# Altium PCB Nixie_Backplane_PCB.PcbDoc
Units mil, origin at the board's own origin, x right, y up, seen from the top; angles counter-clockwise.
Board outline 8000 x 4000 mil, 2 copper layers (Top Layer, Bottom Layer); 48 components, 112 nets, 366 pads, 14 vias.
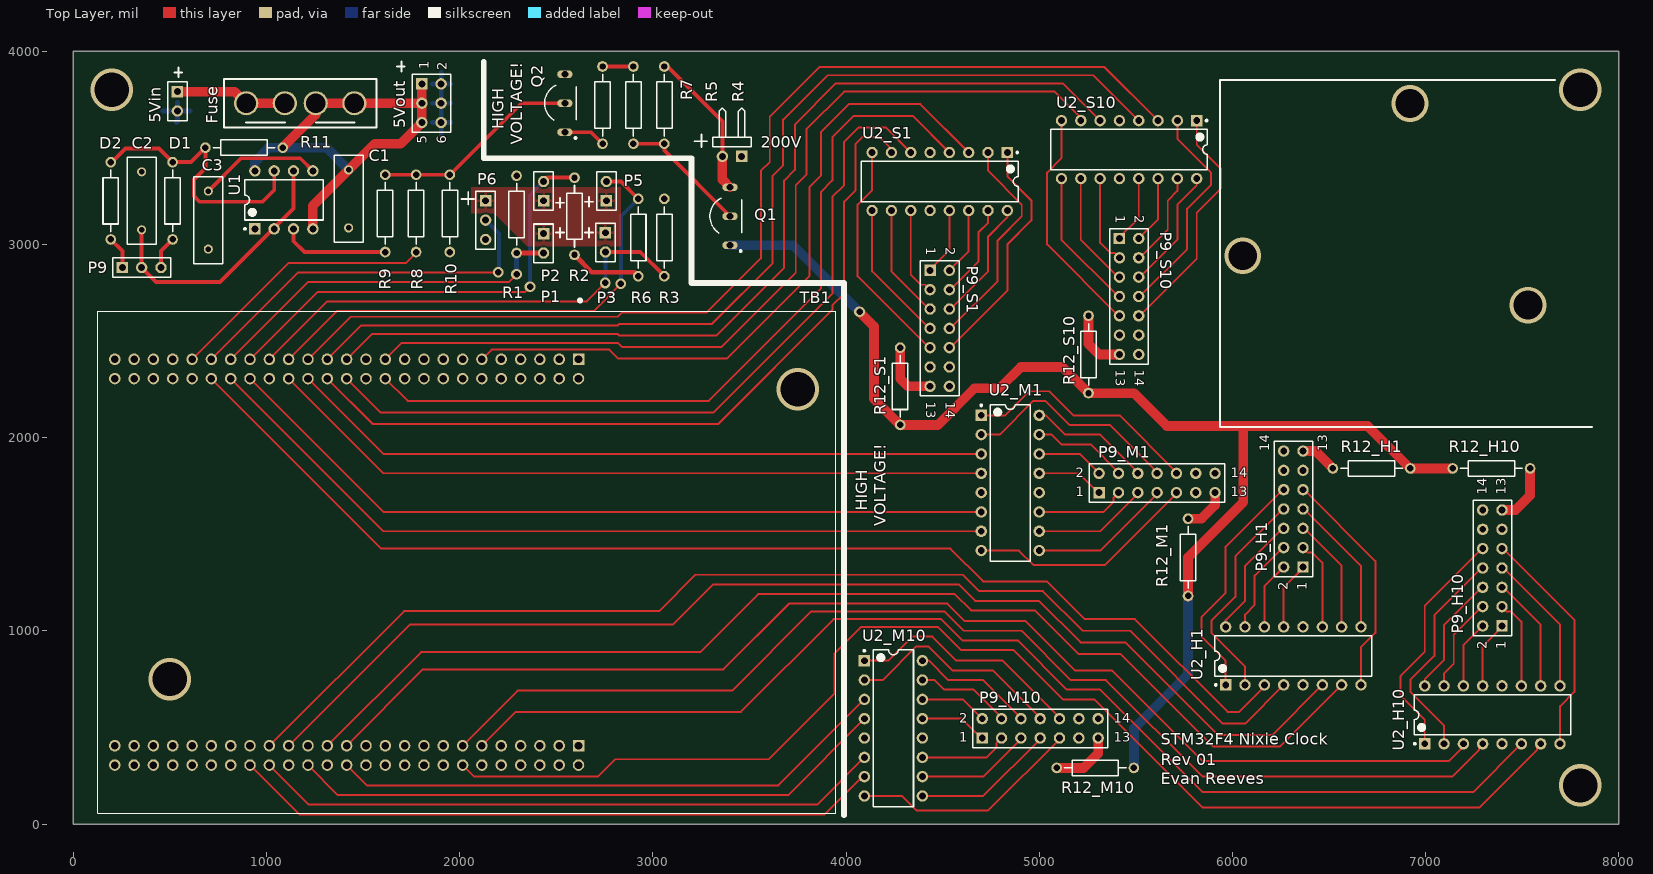
[diagram p0: Top Layer view]
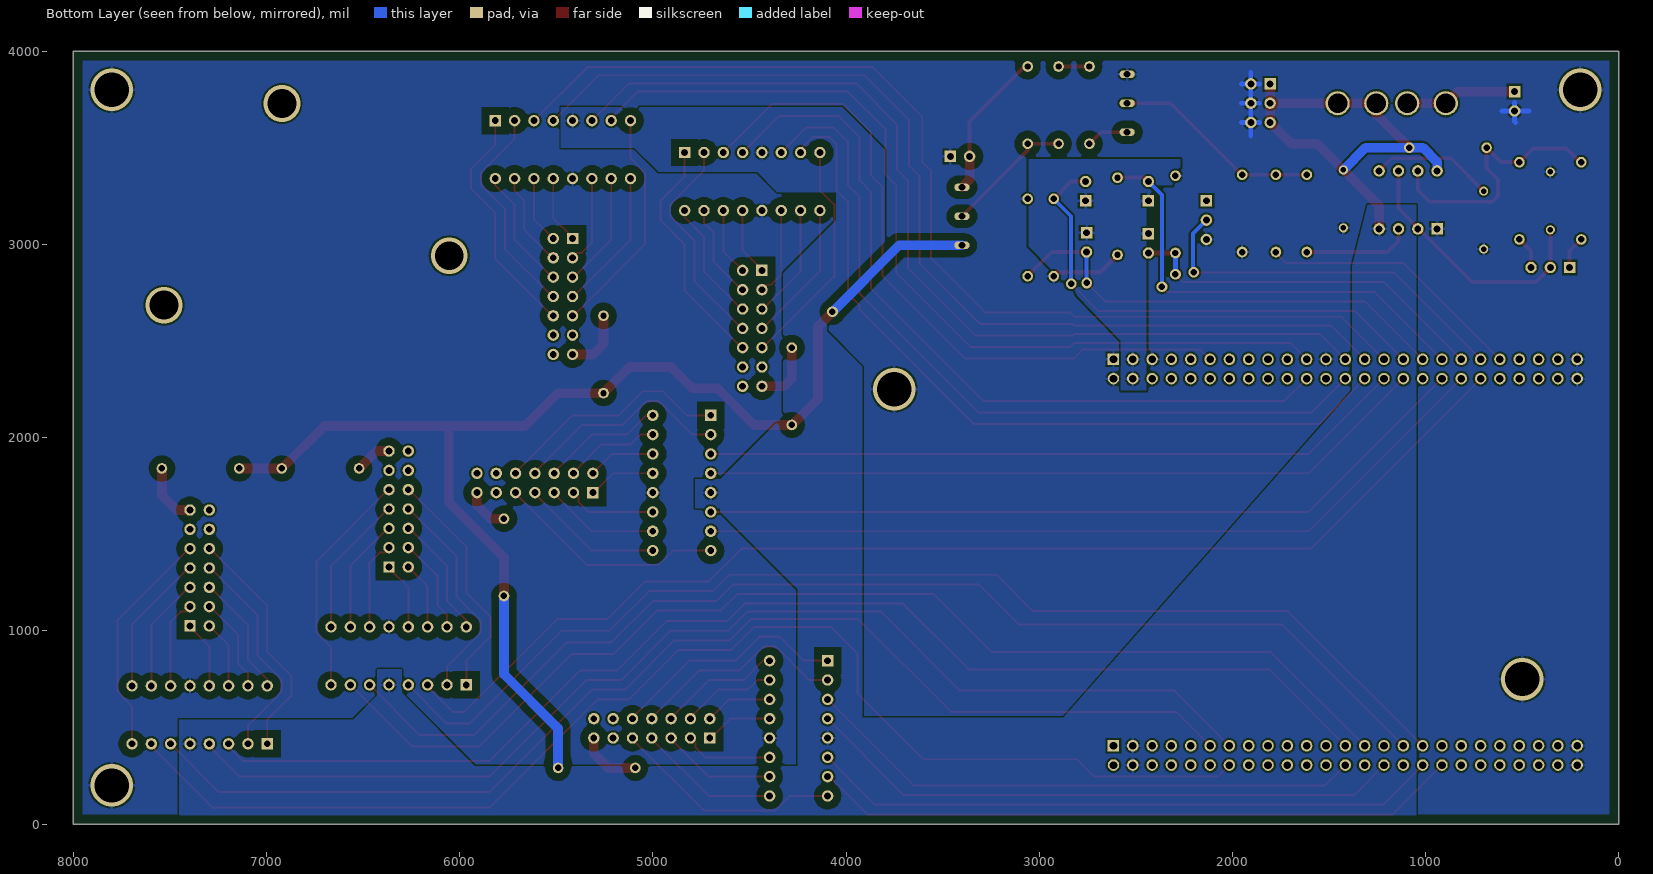
[diagram p1: Bottom Layer view, seen from below]

## Layer stack, top to bottom
Top Layer: signal copper 1.4
Dielectric: dielectric 12.6, FR-4, Dk 4.8
Bottom Layer: signal copper 1.4

## Board outline
0,0 0,4000 8000,4000 8000,0 0,0

## Design rules (kind name [scope] priority, off if disabled: settings)
Clearance Clearance_1 [InNetClass('HV')] p1: gap=40
Clearance "Schematic Clearance Constraint_4" [InNet('NetQ1_2')] p2: gap=40
Clearance "Schematic Clearance Constraint_3" [InNet('NetR5_2')] p3: gap=40
Clearance "Schematic Clearance Constraint_2" [InNet('Net200V_2')] p4: gap=40
Clearance "Schematic Clearance Constraint_1" [InNet('NetQ2_1')] p5: gap=40
Clearance "Schematic Clearance Constraint" [InNet('VANODE')] p6: gap=40
Clearance [All] p7: gap=10
HoleSize [All] p1: absolutevalues=TRUE maxlimit=400 minlimit=10 maxpercent=80.000 minpercent=20.000
PolygonConnect [All] p1: connectstyle=Relief reliefconductorwidth=15 reliefentries=4 polygonreliefangle="90 Angle"
RoomDefinition Main [InComponentClass('Main')] p1 off: confinementstyle=ConfineIn formatcopy=TRUE lockcomponents=FALSE outline 3925,55 3925,2878.39 3742.9,3057.03 3742.9,3975 25,3975 25,55
RoomDefinition S10 [InComponentClass('S10')] p2 off: confinementstyle=ConfineIn formatcopy=TRUE lockcomponents=FALSE outline -2000,-2000 0,-2000 0,-1000 -2000,-1000
RoomDefinition S1 [InComponentClass('S1')] p3 off: confinementstyle=ConfineIn formatcopy=TRUE lockcomponents=FALSE outline -2000,-2000 0,-2000 0,-1000 -2000,-1000
RoomDefinition M10 [InComponentClass('M10')] p4 off: confinementstyle=ConfineIn formatcopy=TRUE lockcomponents=FALSE outline -2000,-2000 0,-2000 0,-1000 -2000,-1000
RoomDefinition M1 [InComponentClass('M1')] p5 off: confinementstyle=ConfineIn formatcopy=TRUE lockcomponents=FALSE outline -2000,-2000 0,-2000 0,-1000 -2000,-1000
RoomDefinition H1 [InComponentClass('H1')] p6 off: confinementstyle=ConfineIn formatcopy=TRUE lockcomponents=FALSE outline -2000,-2000 0,-2000 0,-1000 -2000,-1000
RoomDefinition H10 [InComponentClass('H10')] p7 off: confinementstyle=ConfineIn formatcopy=TRUE lockcomponents=FALSE outline 6825,320 7820,320 7820,1865 6825,1865
RoutingVias [All] p1: holewidth=28 width=50 viastyle="Through Hole" minholewidth=28 minwidth=50 maxholewidth=28 maxwidth=50
SilkscreenOverComponentPads [All] p1: minsilkscreentomaskgap=8
SolderMaskExpansion [All] p1: expansion=4
Width [All] p1: maxlimit=200 minlimit=10 preferedwidth=10
26 further rules are at their usual default settings.

## Classes and differential pairs
component class S10: P9_S10 R12_S10 U2_S10
component class S1: P9_S1 R12_S1 U2_S1
component class M10: P9_M10 R12_M10 U2_M10
component class M1: P9_M1 R12_M1 U2_M1
component class H10: P9_H10 R12_H10 U2_H10
component class H1: P9_H1 R12_H1 U2_H1
channel class Tube: Tube_H1 Tube_H10 Tube_M1 Tube_M10 Tube_S1 Tube_S10
component class Main: 5Vin 5Vout 200V C1 C2 C3 D1 D2 Fuse P1 P2 P3 P5 P6 P9 Q1 Q2 R1 R2 R3 R4 R5 R6 R7 R8 R9 R10 R11 TB1 U1
net class HV: C0_H1 C0_H10 C0_M1 C0_M10 C0_S1 C0_S10 C1_H1 C1_H10 C1_M1 C1_M10 C1_S1 C1_S10 C2_H1 C2_H10 C2_M1 C2_M10 C2_S1 C2_S10 C3_H1 C3_H10 C3_M1 C3_M10 C3_S1 C3_S10 C4_H1 C4_H10 C4_M1 C4_M10 C4_S1 C4_S10 C5_H1 C5_H10 C5_M1 C5_M10 C5_S1 C5_S10 C6_H1 C6_H10 C6_M1 C6_M10 C6_S1 C6_S10 C7_H1 C7_H10 C7_M1 C7_M10 C7_S1 C7_S10 C8_H1 C8_H10 C8_M1 C8_M10 C8_S1 C8_S10 C9_H1 C9_H10 C9_M1 C9_M10 C9_S1 C9_S10 Net200V_2 NetP9_H1_13 NetP9_H10_13 NetP9_M1_13 NetP9_M10_13 NetP9_S1_13 NetP9_S10_13 NetQ1_2 NetQ2_1 NetR5_2 VANODE

## Components (designator, comment, footprint, x,y, rotation, side; value= is the part's Value field where it differs from the comment)
5Vin "Header, 5V" HDR1X2 540,3790 r270 top (schematic designator P7)
5Vout "Header, 5V" HDR2X3 1805,3830 r270 top (schematic designator P8)
200V "200Vin" HDR1X2H 3460,3455 r180 top (schematic designator P4)
C1 "Cap" RAD-0.3 1425.91,3235 r270 top
C2 "" RAD-0.3 355,3225 r270 top
C3 "Cap" RAD-0.3 700,3125 r90 top
D1 "Schottky" AXIAL-0.4 515,3225 r90 top
D2 "Schottky" AXIAL-0.4 195,3225 r270 top
Fuse "Blade Fuse" FUSEHOLDER 895.91,3730 r0 top (schematic designator F1)
P1 "BTN, Hour" HDR1X2 2435,3055 r270 top
P2 "BTN, Second" HDR1X2 2435,3225 r90 top
P3 "BTN, Minute" HDR1X2 2755,3060 r270 top
P5 "BTN, Anniv" HDR1X2 2760,3225 r90 top
P6 "Pot, Digital" HDR1X3 2135,3225 r270 top
P9 "Pot, Analog" HDR1X3 255,2880 r0 top
P9_H1 "Header 7X2" HDR2X7 6365,1330 r90 top (schematic designator P9)
P9_H10 "Header 7X2" HDR2X7 7395,1025 r90 top (schematic designator P9)
P9_M1 "Header 7X2" HDR2X7 5310,1715 r0 top (schematic designator P9)
P9_M10 "Header 7X2" HDR2X7 4705,445 r0 top (schematic designator P9)
P9_S1 "Header 7X2" HDR2X7 4435,2865 r270 top (schematic designator P9)
P9_S10 "Header 7X2" HDR2X7 5415,3030 r270 top (schematic designator P9)
Q1 "PNP" T0-226-BEND 3350,2970 r0 top
Q2 "NPN" T0-226-BEND 2495,3555 r0 top
R1 "AXIAL-0.4" AXIAL-0.4 2295,3155 r90 top
R2 "AXIAL-0.4" AXIAL-0.4 2595,3145 r270 top
R3 "AXIAL-0.4" AXIAL-0.4 3060,3035 r90 top
R4 "AXIAL-0.4" AXIAL-0.4 3060,3720 r270 top
R5 "AXIAL-0.4" AXIAL-0.4 2900,3720 r90 top
R6 "AXIAL-0.4" AXIAL-0.4 2925,3035 r270 top
R7 "AXIAL-0.4" AXIAL-0.4 2740,3720 r270 top
R8 "AXIAL-0.4" AXIAL-0.4 1775,3160 r90 top
R9 "AXIAL-0.4" AXIAL-0.4 1615,3160 r270 top
R10 "AXIAL-0.4" AXIAL-0.4 1950,3160 r270 top
R11 "AXIAL-0.4" AXIAL-0.4 885,3500 r180 top
R12_H1 "AXIAL-0.4" AXIAL-0.4 6720,1840 r180 top (schematic designator R12)
R12_H10 "AXIAL-0.4" AXIAL-0.4 7340,1840 r0 top (schematic designator R12)
R12_M1 "AXIAL-0.4" AXIAL-0.4 5770,1380 r90 top (schematic designator R12)
R12_M10 "AXIAL-0.4" AXIAL-0.4 5290,290 r180 top (schematic designator R12)
R12_S1 "AXIAL-0.4" AXIAL-0.4 4280,2265 r90 top (schematic designator R12)
R12_S10 "AXIAL-0.4" AXIAL-0.4 5255,2430 r90 top (schematic designator R12)
TB1 "STM32F4DISCOVERY" *MODULE_STM32F4DISCOVERY_STM32F4DISCOVERY_Primary 2037.95,1355 r270 top
U1 "555 Timer" DIP-8 1090.91,3230 r90 top
U2_H1 "SN74141" DIP-16 6315,870 r90 top (schematic designator U2)
U2_H10 "SN74141" DIP-16 7345,565 r90 top (schematic designator U2)
U2_M1 "SN74141" DIP-16 4850,1765 r0 top (schematic designator U2)
U2_M10 "SN74141" DIP-16 4245,495 r0 top (schematic designator U2)
U2_S1 "SN74141" DIP-16 4485,3325 r270 top (schematic designator U2)
U2_S10 "SN74141" DIP-16 5465,3490 r270 top (schematic designator U2)

## Footprints (in the part's own frame and the unit in brackets; to place one, negate y for a bottom-side part, rotate by r counter-clockwise, add the part's x,y. Pads: shape width x height; smd on the part's side, far side on the other; paste and mask are expansions set on the pad)
*MODULE_STM32F4DISCOVERY_STM32F4DISCOVERY_Primary [mm]
  rect 1.508x1.508 hole 1: P1_1(-26.67,14.68) P2_1(24.13,14.68)
  round 1.508 hole 1: P1_2(-24.13,14.68) P1_3(-26.67,12.14) P1_4(-24.13,12.14) P1_5(-26.67,9.6) P1_6(-24.13,9.6) P1_7(-26.67,7.06) P1_8(-24.13,7.06) P1_9(-26.67,4.52) P1_10(-24.13,4.52) P1_11(-26.67,1.98) P1_12(-24.13,1.98) P1_13(-26.67,-0.56) P1_14(-24.13,-0.56) P1_15(-26.67,-3.1) P1_16(-24.13,-3.1) P1_17(-26.67,-5.64) P1_18(-24.13,-5.64) P1_19(-26.67,-8.18) P1_20(-24.13,-8.18) P1_21(-26.67,-10.72) P1_22(-24.13,-10.72) P1_23(-26.67,-13.26) P1_24(-24.13,-13.26) P1_25(-26.67,-15.8) P1_26(-24.13,-15.8) P1_27(-26.67,-18.34) P1_28(-24.13,-18.34) P1_29(-26.67,-20.88) P1_30(-24.13,-20.88) P1_31(-26.67,-23.42) P1_32(-24.13,-23.42) P1_33(-26.67,-25.96) P1_34(-24.13,-25.96) P1_35(-26.67,-28.5) P1_36(-24.13,-28.5) P1_37(-26.67,-31.04) P1_38(-24.13,-31.04) P1_39(-26.67,-33.58) P1_40(-24.13,-33.58) P1_41(-26.67,-36.12) P1_42(-24.13,-36.12) P1_43(-26.67,-38.66) P1_44(-24.13,-38.66) P1_45(-26.67,-41.2) P1_46(-24.13,-41.2) P1_47(-26.67,-43.74) P1_48(-24.13,-43.74) P1_49(-26.67,-46.28) P1_50(-24.13,-46.28) P2_2(26.67,14.68) P2_3(24.13,12.14) P2_4(26.67,12.14) P2_5(24.13,9.6) P2_6(26.67,9.6) P2_7(24.13,7.06) P2_8(26.67,7.06) P2_9(24.13,4.52) P2_10(26.67,4.52) P2_11(24.13,1.98) P2_12(26.67,1.98) P2_13(24.13,-0.56) P2_14(26.67,-0.56) P2_15(24.13,-3.1) P2_16(26.67,-3.1) P2_17(24.13,-5.64) P2_18(26.67,-5.64) P2_19(24.13,-8.18) P2_20(26.67,-8.18) P2_21(24.13,-10.72) P2_22(26.67,-10.72) P2_23(24.13,-13.26) P2_24(26.67,-13.26) P2_25(24.13,-15.8) P2_26(26.67,-15.8) P2_27(24.13,-18.34) P2_28(26.67,-18.34) P2_29(24.13,-20.88) P2_30(26.67,-20.88) P2_31(24.13,-23.42) P2_32(26.67,-23.42) P2_33(24.13,-25.96) P2_34(26.67,-25.96) P2_35(24.13,-28.5) P2_36(26.67,-28.5) P2_37(24.13,-31.04) P2_38(26.67,-31.04) P2_39(24.13,-33.58) P2_40(26.67,-33.58) P2_41(24.13,-36.12) P2_42(26.67,-36.12) P2_43(24.13,-38.66) P2_44(26.67,-38.66) P2_45(24.13,-41.2) P2_46(26.67,-41.2) P2_47(24.13,-43.74) P2_48(26.67,-43.74) P2_49(24.13,-46.28) P2_50(26.67,-46.28)
  silkscreen extent -34.61,-48.5 33,48.5
AXIAL-0.4 [mm] "Axial Device, Thru-Hole; 2 Leads; 0.4 in Pin Spacing"
  round 1.4 hole 0.85: 1(-5.08,0) 2(5.08,0)
  silkscreen extent -4.06,-1.02 4.06,1.02
DIP-8 [mm] "DIP; 8 Leads; Row Spacing 7.62 mm; Pitch 2.54 mm"
  rect 1.5x1.5 hole 0.9: 1(-3.81,3.81)
  round 1.5 hole 0.9: 2(-3.81,1.27) 3(-3.81,-1.27) 4(-3.81,-3.81) 5(3.81,-3.81) 6(3.81,-1.27) 7(3.81,1.27) 8(3.81,3.81)
  silkscreen extent -3.93,-5.15 2.65,5.23, body extent -3.6,-5.15 3.6,5.15, height 5.08
DIP-16 [mm] "DIP; 16 Leads; Row Spacing 7.62 mm; Pitch 2.54 mm"
  rect 1.5x1.5 hole 0.9: 1(-3.81,8.89)
  round 1.5 hole 0.9: 2(-3.81,6.35) 3(-3.81,3.81) 4(-3.81,1.27) 5(-3.81,-1.27) 6(-3.81,-3.81) 7(-3.81,-6.35) 8(-3.81,-8.89) 9(3.81,-8.89) 10(3.81,-6.35) 11(3.81,-3.81) 12(3.81,-1.27) 13(3.81,1.27) 14(3.81,3.81) 15(3.81,6.35) 16(3.81,8.89)
  silkscreen extent -3.93,-10.3 2.65,10.31, body extent -3.6,-10.28 3.6,10.28, height 5.08
FUSEHOLDER [mil] "ATC, ATO BLADE FUSEHOLDER, 3522 TYPE"
  round 125 hole 100: 1(0,0) 1(200,0) 2(360,0) 2(560,0)
  silkscreen extent -115,-125 675,125
HDR1X2 [mm] "Connector; Header; 2 Position"
  rect 1.5x1.5 hole 0.9: 1(0,0)
  round 1.5 hole 0.9: 2(2.54,0)
  silkscreen extent -1.27,-1.27 3.81,1.27
HDR1X2H [mm] "Connector; Header; 2 Position; Right Angle"
  rect 1.5x1.5 hole 0.9: 1(0,0)
  round 1.5 hole 0.9: 2(2.54,0)
  silkscreen extent -1.27,-6.35 3.81,-1.27
HDR1X3 [mm] "Connector; Header; 3 Position"
  rect 1.5x1.5 hole 0.9: 1(0,0)
  round 1.5 hole 0.9: 2(2.54,0) 3(5.08,0)
  silkscreen extent -1.27,-1.27 6.35,1.27
HDR2X3 [mm] "Connector; Header; 3x2 Position"
  rect 1.5x1.5 hole 0.9: 1(0,0)
  round 1.5 hole 0.9: 2(0,2.54) 3(2.54,0) 4(2.54,2.54) 5(5.08,0) 6(5.08,2.54)
  silkscreen extent -1.27,-1.27 6.35,3.81
HDR2X7 [mm] "Connector; Header; 7x2 Position"
  rect 1.5x1.5 hole 0.9: 1(0,0)
  round 1.5 hole 0.9: 2(0,2.54) 3(2.54,0) 4(2.54,2.54) 5(5.08,0) 6(5.08,2.54) 7(7.62,0) 8(7.62,2.54) 9(10.16,0) 10(10.16,2.54) 11(12.7,0) 12(12.7,2.54) 13(15.24,0) 14(15.24,2.54)
  silkscreen extent -1.27,-1.27 16.51,3.81
RAD-0.3 [mm] "Radial Cap, Thru-Hole; 2 Leads; 0.3 in Pin Spacing"
  round 1.2 hole 0.7: 1(-3.81,0) 2(3.81,0)
  silkscreen extent -5.71,-1.91 5.71,1.91
T0-226-BEND [mm]
  oval 2x1 hole 0.9: 1(1.27,0.635) 2(1.27,4.445) 3(1.27,8.255)
  silkscreen extent -1.38,-0.25 2.79,6.82, body extent -1.39,1.79 2.79,7.1, height 5.33

## Part data
5Vin P1 P2 P3 P5: library part "Header 2", "Header, 2-Pin"
5Vout: library part "Header 3X2", "Header, 3-Pin, Dual row"
200V: library part "Header 2H", "Header, 2-Pin, Right Angle"
C1 C3: "Capacitor"
C2: library part Cap, "Capacitor"
D1 D2: library part "D Schottky", "Schottky Diode"
Fuse: library part "Fuse 2", "Fuse"
P6 P9: library part "Header 3", "Header, 3-Pin"
P9_H1 P9_H10 P9_M1 P9_M10 P9_S1 P9_S10: "Header, 7-Pin, Dual row"
Q1: "PNP Bipolar Transistor"
Q2: "NPN Bipolar Transistor"
R1 R2 R3 R4 R5 R6 R7 R8 R9 R10 R11 R12_H1 R12_H10 R12_M1 R12_M10 R12_S1 R12_S10: library part Res3, "Resistor"
TB1: "Development kit: ARM ST; pin strips, pin header; No.of"
U2_H1 U2_H10 U2_M1 U2_M10 U2_S1 U2_S10: library part "BCD-to-Decimal Driver", "BCD-to-Decimal Driver"

## Via types
v1: diameter 55.12, hole 33.46, Top Layer to Bottom Layer, 6 vias
v2: diameter 220, hole 177, Top Layer to Bottom Layer, 5 vias
v3: diameter 190, hole 149.5, Top Layer to Bottom Layer, 3 vias

## Nets (pads, with @x,y where several pads share a name; then routed paths per layer and width w, separated by ;. In a path a pad name is that pad's centre, name@x,y a point inside that pad or via, vN(x,y) a via of type N, cw(c..) or ccw(c..) an arc to the next point about the centre after c; other vN are vias at no path point)
5V: 5Vout.1 5Vout.3 5Vout.5 C1.1 Fuse.2 R11.1 TB1.P2_3 TB1.P2_4 U1.4 U1.8 U2_H1.5 U2_H10.5 U2_M1.5 U2_M10.5 U2_S1.5 U2_S10.5 | length 2523.2
  Top Layer w50: R11.1 1255.91,3670.91 1255.91,3730 1455.91,3730 5Vout.3 ; U1.4 1240.91,3200 C1.1 1560.91,3520 1695,3520 5Vout.5 5Vout.3 ; 5Vout.1 5Vout.3
  Bottom Layer w20: U2_M10.5@4095,444.06 U2_M10.5 U2_M10.5@4095,445.94
  Bottom Layer w50: U1.8 940.91,3425.91 1015,3500 R11.1 1310.91,3500 C1.1
BRI_PWM: R8.1 TB1.P1_41 | length 1402.8
  Top Layer w10: TB1.P1_41 1115.12,2904.21 1724.21,2904.21 1775,2955 R8.1
  Bottom Layer w20: R8.1 R8.1@1785.91,2960
C0_H1: P9_H1.6 U2_H1.16 | length 637.4
  Top Layer w10: U2_H1.16 5965,1054.69 6065,1154.69 6065,1335.4 6259.6,1530 P9_H1.6
C0_H10: P9_H10.6 U2_H10.16 | length 637.4
  Top Layer w10: U2_H10.16 6995,749.69 7095,849.69 7095,1030.4 7289.6,1225 P9_H10.6
C0_M1: P9_M1.6 U2_M1.16 | length 637.4
  Top Layer w10: U2_M1.16 5034.69,2115 5134.69,2015 5315.4,2015 5510,1820.4 P9_M1.6
C0_M10: P9_M10.6 U2_M10.16 | length 637.4
  Top Layer w10: U2_M10.16 4429.69,845 4529.69,745 4710.4,745 4905,550.4 P9_M10.6
C0_S1: P9_S1.6 U2_S1.16 | length 637.4
  Top Layer w10: P9_S1.6 4540.4,2665 4735,2859.6 4735,3040.31 4835,3140.31 U2_S1.16
C0_S10: P9_S10.6 U2_S10.16 | length 637.4
  Top Layer w10: P9_S10.6 5520.4,2830 5715,3024.6 5715,3205.31 5815,3305.31 U2_S10.16
C1_H1: P9_H1.4 U2_H1.15 | length 496
  Top Layer w10: U2_H1.15 6065,1083.98 6115,1133.98 6115,1285.4 6259.6,1430 P9_H1.4
C1_H10: P9_H10.4 U2_H10.15 | length 496
  Top Layer w10: U2_H10.15 7095,778.98 7145,828.98 7145,980.4 7289.6,1125 P9_H10.4
C1_M1: P9_M1.4 U2_M1.15 | length 496
  Top Layer w10: U2_M1.15 5063.98,2015 5113.98,1965 5265.4,1965 5410,1820.4 P9_M1.4
C1_M10: P9_M10.4 U2_M10.15 | length 496
  Top Layer w10: U2_M10.15 4458.98,745 4508.98,695 4660.4,695 4805,550.4 P9_M10.4
C1_S1: P9_S1.4 U2_S1.15 | length 496
  Top Layer w10: P9_S1.4 4540.4,2765 4685,2909.6 4685,3061.02 4735,3111.02 U2_S1.15
C1_S10: P9_S10.4 U2_S10.15 | length 496
  Top Layer w10: P9_S10.4 5520.4,2930 5665,3074.6 5665,3226.02 5715,3276.02 U2_S10.15
C2_H1: P9_H1.9 U2_H1.8 | length 1199.2
  Top Layer w10: P9_H1.9 6370.4,1730 6739.53,1360.87 6739.53,989.13 6665,914.6 U2_H1.8
C2_H10: P9_H10.9 U2_H10.8 | length 1199.2
  Top Layer w10: P9_H10.9 7400.4,1425 7769.53,1055.87 7769.53,684.13 7695,609.6 U2_H10.8
C2_M1: P9_M1.9 U2_M1.8 | length 1199.2
  Top Layer w10: U2_M1.8 4894.6,1415 4969.13,1340.47 5340.87,1340.47 5710,1709.6 P9_M1.9
C2_M10: P9_M10.9 U2_M10.8 | length 1199.2
  Top Layer w10: U2_M10.8 4289.6,145 4364.13,70.47 4735.87,70.47 5105,439.6 P9_M10.9
C2_S1: P9_S1.9 U2_S1.8 | length 1199.2
  Top Layer w10: U2_S1.8 4135,3280.4 4060.47,3205.87 4060.47,2834.13 4429.6,2465 P9_S1.9
C2_S10: P9_S10.9 U2_S10.8 | length 1199.2
  Top Layer w10: U2_S10.8 5115,3445.4 5040.47,3370.87 5040.47,2999.13 5409.6,2630 P9_S10.9
C3_H1: P9_H1.7 U2_H1.9 | length 737.4
  Top Layer w10: P9_H1.7 6370.4,1630 6665,1335.4 U2_H1.9
C3_H10: P9_H10.7 U2_H10.9 | length 737.4
  Top Layer w10: P9_H10.7 7400.4,1325 7695,1030.4 U2_H10.9
C3_M1: P9_M1.7 U2_M1.9 | length 737.4
  Top Layer w10: U2_M1.9 5315.4,1415 5610,1709.6 P9_M1.7
C3_M10: P9_M10.7 U2_M10.9 | length 737.4
  Top Layer w10: U2_M10.9 4710.4,145 5005,439.6 P9_M10.7
C3_S1: P9_S1.7 U2_S1.9 | length 737.4
  Top Layer w10: U2_S1.9 4135,2859.6 4429.6,2565 P9_S1.7
C3_S10: P9_S10.7 U2_S10.9 | length 737.4
  Top Layer w10: U2_S10.9 5115,3024.6 5409.6,2730 P9_S10.7
C4_H1: P9_H1.1 U2_H1.13 | length 351.4
  Top Layer w10: U2_H1.13 6265,1224.6 6365,1324.6 P9_H1.1
C4_H10: P9_H10.1 U2_H10.13 | length 351.4
  Top Layer w10: U2_H10.13 7295,919.6 7395,1019.6 P9_H10.1
C4_M1: P9_M1.1 U2_M1.13 | length 351.4
  Top Layer w10: U2_M1.13 5204.6,1815 5304.6,1715 P9_M1.1
C4_M10: P9_M10.1 U2_M10.13 | length 351.4
  Top Layer w10: U2_M10.13 4599.6,545 4699.6,445 P9_M10.1
C4_S1: P9_S1.1 U2_S1.13 | length 351.4
  Top Layer w10: P9_S1.1 4435,2870.4 4535,2970.4 U2_S1.13
C4_S10: P9_S10.1 U2_S10.13 | length 351.4
  Top Layer w10: P9_S10.1 5415,3035.4 5515,3135.4 U2_S10.13
C5_H1: P9_H1.2 U2_H1.14 | length 351.4
  Top Layer w10: U2_H1.14 6165,1230 P9_H1.2
C5_H10: P9_H10.2 U2_H10.14 | length 351.4
  Top Layer w10: U2_H10.14 7195,925 P9_H10.2
C5_M1: P9_M1.2 U2_M1.14 | length 351.4
  Top Layer w10: U2_M1.14 5210,1915 P9_M1.2
C5_M10: P9_M10.2 U2_M10.14 | length 351.4
  Top Layer w10: U2_M10.14 4605,645 P9_M10.2
C5_S1: P9_S1.2 U2_S1.14 | length 351.4
  Top Layer w10: P9_S1.2 4635,2965 U2_S1.14
C5_S10: P9_S10.2 U2_S10.14 | length 351.4
  Top Layer w10: P9_S10.2 5615,3130 U2_S10.14
C6_H1: P9_H1.3 U2_H1.11 | length 464.7
  Top Layer w10: P9_H1.3 6390.47,1404.53 6413.17,1404.53 6465,1352.69 U2_H1.11
C6_H10: P9_H10.3 U2_H10.11 | length 464.7
  Top Layer w10: P9_H10.3 7420.47,1099.53 7443.17,1099.53 7495,1047.69 U2_H10.11
C6_M1: P9_M1.3 U2_M1.11 | length 464.7
  Top Layer w10: U2_M1.11 5332.69,1615 5384.53,1666.83 5384.53,1689.53 P9_M1.3
C6_M10: P9_M10.3 U2_M10.11 | length 464.7
  Top Layer w10: U2_M10.11 4727.69,345 4779.53,396.83 4779.53,419.53 P9_M10.3
C6_S1: P9_S1.3 U2_S1.11 | length 464.7
  Top Layer w10: U2_S1.11 4335,2842.31 4386.83,2790.47 4409.53,2790.47 P9_S1.3
C6_S10: P9_S10.3 U2_S10.11 | length 464.7
  Top Layer w10: U2_S10.11 5315,3007.31 5366.83,2955.47 5389.53,2955.47 P9_S10.3
C7_H1: P9_H1.5 U2_H1.10 | length 596
  Top Layer w10: P9_H1.5 6370.4,1530 6565,1335.4 U2_H1.10
C7_H10: P9_H10.5 U2_H10.10 | length 596
  Top Layer w10: P9_H10.5 7400.4,1225 7595,1030.4 U2_H10.10
C7_M1: P9_M1.5 U2_M1.10 | length 596
  Top Layer w10: U2_M1.10 5315.4,1515 5510,1709.6 P9_M1.5
C7_M10: P9_M10.5 U2_M10.10 | length 596
  Top Layer w10: U2_M10.10 4710.4,245 4905,439.6 P9_M10.5
C7_S1: P9_S1.5 U2_S1.10 | length 596
  Top Layer w10: U2_S1.10 4235,2859.6 4429.6,2665 P9_S1.5
C7_S10: P9_S10.5 U2_S10.10 | length 596
  Top Layer w10: U2_S10.10 5215,3024.6 5409.6,2830 P9_S10.5
C8_H1: P9_H1.10 U2_H1.1 | length 1240.6
  Top Layer w10: U2_H1.1 5965,843.89 5840.47,968.42 5840.47,1071.58 5965,1196.11 5965,1435.4 6259.6,1730 P9_H1.10
C8_H10: P9_H10.10 U2_H10.1 | length 1240.6
  Top Layer w10: U2_H10.1 6995,538.89 6870.47,663.42 6870.47,766.58 6995,891.11 6995,1130.4 7289.6,1425 P9_H10.10
C8_M1: P9_M1.10 U2_M1.1 | length 1240.6
  Top Layer w10: U2_M1.1 4823.89,2115 4948.42,2239.53 5051.58,2239.53 5176.11,2115 5415.4,2115 5710,1820.4 P9_M1.10
C8_M10: P9_M10.10 U2_M10.1 | length 1240.6
  Top Layer w10: U2_M10.1 4218.89,845 4343.42,969.53 4446.58,969.53 4571.11,845 4810.4,845 5105,550.4 P9_M10.10
C8_S1: P9_S1.10 U2_S1.1 | length 1240.6
  Top Layer w10: P9_S1.10 4540.4,2465 4835,2759.6 4835,2998.89 4959.53,3123.42 4959.53,3226.58 4835,3351.11 U2_S1.1
C8_S10: P9_S10.10 U2_S10.1 | length 1240.6
  Top Layer w10: P9_S10.10 5520.4,2630 5815,2924.6 5815,3163.89 5939.53,3288.42 5939.53,3391.58 5815,3516.11 U2_S10.1
C9_H1: P9_H1.8 U2_H1.2 | length 1140.6
  Top Layer w10: U2_H1.2 6065,814.6 5890.47,989.13 5890.47,1050.87 6015,1175.4 6015,1385.4 6259.6,1630 P9_H1.8
C9_H10: P9_H10.8 U2_H10.2 | length 1140.6
  Top Layer w10: U2_H10.2 7095,509.6 6920.47,684.13 6920.47,745.87 7045,870.4 7045,1080.4 7289.6,1325 P9_H10.8
C9_M1: P9_M1.8 U2_M1.2 | length 1140.6
  Top Layer w10: U2_M1.2 4794.6,2015 4969.13,2189.53 5030.87,2189.53 5155.4,2065 5365.4,2065 5610,1820.4 P9_M1.8
C9_M10: P9_M10.8 U2_M10.2 | length 1140.6
  Top Layer w10: U2_M10.2 4189.6,745 4364.13,919.53 4425.87,919.53 4550.4,795 4760.4,795 5005,550.4 P9_M10.8
C9_S1: P9_S1.8 U2_S1.2 | length 1140.6
  Top Layer w10: P9_S1.8 4540.4,2565 4785,2809.6 4785,3019.6 4909.53,3144.13 4909.53,3205.87 4735,3380.4 U2_S1.2
C9_S10: P9_S10.8 U2_S10.2 | length 1140.6
  Top Layer w10: P9_S10.8 5520.4,2730 5765,2974.6 5765,3184.6 5889.53,3309.13 5889.53,3370.87 5715,3545.4 U2_S10.2
GND: 5Vin.2 5Vout.2 5Vout.4 5Vout.6 200V.1 C1.2 C2.1 C3.1 P6.3 Q2.3 R1.2 R2.2 R3.2 R6.2 R10.2 TB1.P1_1 TB1.P1_2 TB1.P1_5 TB1.P1_23 TB1.P1_49 TB1.P1_50 TB1.P2_49 TB1.P2_50 U1.1 U2_H1.12 U2_H10.12 U2_M1.12 U2_M10.12 U2_S1.12 U2_S10.12 | length 1244.7
  Top Layer w25: R2.2 2685,2855 2905,2855 R6.2
  Bottom Layer w25: 465,3690 5Vin.2 ; 535,3630 540,3635 5Vin.2 ; 5Vin.2@535,3685 5Vin.2 ; 540,3735 5Vin.2 ; 605,3690 5Vin.2 ; 1860,3630 5Vout.6 ; 1860,3730 5Vout.4 ; 1860,3830 5Vout.2 ; 1905,3560 5Vout.6 ; 1905,3890 5Vout.2 ; 1955,3630 5Vout.6 ; 1955,3730 5Vout.4 ; 1955,3830 5Vout.2 ; 5Vout.6 5Vout.4 ; 5Vout.4 5Vout.2
  other v2: 7800,200 500,750 3750,2250 200,3800 7800,3800
H1_A: TB1.P1_40 U2_H1.3 | length 6227.5
  Top Layer w10: TB1.P1_40 1595.91,1425 4540,1425 4710,1255 5040,1255 5235,1060 5495,1060 5975,580 6035,580 6165,710 U2_H1.3
H1_B: TB1.P2_31 U2_H1.6 | length 6125.7
  Top Layer w10: TB1.P2_31 1742.33,1031.42 3103.58,1031.42 3312.16,1240 4583.58,1240 4668.58,1155 4998.58,1155 5213.58,940 5445.29,940 5925.29,460 6205,460 U2_H1.6
H1_C: TB1.P2_27 U2_H1.7 | length 6034
  Top Layer w10: TB1.P2_27 1800.91,890 3245,890 3545,1190 4562.87,1190 4647.87,1105 4977.87,1105 5202.87,880 5420.44,880 5900.44,400 6245,400 U2_H1.7
H1_D: TB1.P2_33 U2_H1.4 | length 6017.5
  Top Layer w10: TB1.P2_33 1713.04,1102.13 3032.87,1102.13 3220.74,1290 4604.29,1290 4689.29,1205 5019.29,1205 5224.29,1000 5470.15,1000 5950.15,520 6065,520 U2_H1.4
H10_A: TB1.P2_25 U2_H10.3 | length 6473.4
  Top Layer w10: TB1.P2_25 1810.91,800 3365,800 3705,1140 4525,1140 4615,1050 4930,1050 5185,795 5375,795 5845,325 7120,325 U2_H10.3@7210,415
H10_B: TB1.P2_11 U2_H10.6 | length 6124.7
  Top Layer w10: TB1.P2_11 2290.91,580 3456.13,580 3936.13,1060 4491.86,1060 4601.86,950 4888.58,950 5143.58,695 5315,695 5845,165 7245,165 U2_H10.6
H10_C: TB1.P2_14 U2_H10.7 | length 6576.7
  Top Layer w10: TB1.P2_14 2075.91,245 2715,245 2805,335 3600,335 3940,675 3940,880 4080,1020 4475.29,1020 4595.29,900 4867.87,900 5122.87,645 5285,645 5845,85 7278.14,85 7575,381.86 7575,395 U2_H10.7
H10_D: TB1.P2_13 U2_H10.4 | length 5999.2
  Top Layer w10: TB1.P2_13 2300.91,690 3410.56,690 3820.56,1100 4508.43,1100 4608.43,1000 4909.29,1000 5164.29,745 5345,745 5845,245 7138.14,245 7275,381.86 7275,395 U2_H10.4
M1_A: TB1.P1_30 U2_M1.3 | length 3645.6
  Top Layer w10: TB1.P1_30 1605.91,1915 U2_M1.3
M1_B: TB1.P1_36 U2_M1.6 | length 4069.9
  Top Layer w10: TB1.P1_36 1605.91,1615 U2_M1.6
M1_C: TB1.P1_38 U2_M1.7 | length 4211.3
  Top Layer w10: TB1.P1_38 1605.91,1515 U2_M1.7
M1_D: TB1.P1_32 U2_M1.4 | length 3787.1
  Top Layer w10: TB1.P1_32 1605.91,1815 U2_M1.4
M10_A: TB1.P2_26 U2_M10.3 | length 2906.9
  Top Layer w10: TB1.P2_26 1520.91,200 3650,200 U2_M10.3
M10_B: TB1.P2_34 U2_M10.6 | length 3265.5
  Top Layer w10: TB1.P2_34 1220.91,100 3850,100 U2_M10.6
M10_C: TB1.P2_36 U2_M10.7 | length 3362.6
  Top Layer w10: TB1.P2_36 1170.91,50 3890,50 U2_M10.7@4090,250
M10_D: TB1.P2_30 U2_M10.4 | length 3106.9
  Top Layer w10: TB1.P2_30 1370.91,150 3700,150 U2_M10.4
Net5Vin_1: 5Vin.1 Fuse.1 | length 580.8
  Top Layer w50: 5Vin.1 835.91,3790 895.91,3730 Fuse.1@1095.91,3730
Net200V_2: 200V.2 Q1.3 R4.1 | length 780.8
  Top Layer w20: R4.1@3060,3935 3360,3635 200V.2
  Top Layer w50: 200V.2 3360,3335 Q1.3
NetC2_2: C2.2 P9.2 U1.2 U1.6 | length 1364.4
  Top Layer w20: C2.2 P9.2 430,2805 760.91,2805 1140.91,3185 U1.6
NetC3_2: C3.2 U1.5 | length 638.2
  Top Layer w20: C3.2 870,3445 1175.91,3445 U1.5
NetD1_1: D1.1 P9.3 | length 169.9
  Top Layer w20: P9.3 455,2965 D1.1
NetD1_2: D1.2 D2.1 R11.2 U1.7 | length 1407.8
  Top Layer w20: D2.1 200.91,3425 270.91,3495 445,3495 D1.2 ; D1.2@515.91,3424.09 D1.2 ; U1.7 1040.91,3280.91 980,3220 655,3220 625,3250 625,3335 685,3395 R11.2 610,3425 D1.2
NetD2_2: D2.2 P9.1 | length 169.9
  Top Layer w20: D2.2 255,2965 P9.1
NetP9_H1_13: P9_H1.13 R12_H1.2 | length 192.3
  Top Layer w50: P9_H1.13 6430,1930 R12_H1.2
NetP9_H10_13: P9_H10.13 R12_H10.2 | length 316
  Top Layer w50: P9_H10.13 7464.86,1625 7540,1700.14 R12_H10.2
NetP9_M1_13: P9_M1.13 R12_M1.2 | length 234
  Top Layer w50: R12_M1.2 5840,1580 5910,1650 P9_M1.13
NetP9_M10_13: P9_M10.13 R12_M10.2 | length 326.1
  Top Layer w50: R12_M10.2 5230,290 5305,365 P9_M10.13
NetP9_S1_13: P9_S1.13 R12_S1.2 | length 331.6
  Top Layer w50: R12_S1.2 4280,2305 4320,2265 P9_S1.13
NetP9_S10_13: P9_S10.13 R12_S10.2 | length 327.8
  Top Layer w50: R12_S10.2 5255,2485 5310,2430 P9_S10.13
NetQ1_2: Q1.2 R4.2 R5.1 | length 675.8
  Top Layer w20: R5.1 R4.2 3060,3485 Q1.2
NetQ2_1: Q2.1 R7.2 | length 219.9
  Top Layer w20: Q2.1 2680,3580 R7.2
NetQ2_2: Q2.2 R8.2 R9.1 R10.1 | length 1083.3
  Top Layer w20: R9.1 R8.2 R10.1 2320,3730 Q2.2
NetR5_2: R5.2 R7.1 | length 160
  Top Layer w20: R7.1 R5.2
NetR9_2: R9.2 U1.3 | length 575.5
  Top Layer w20: U1.3 1140.91,3015.91 1196.81,2960 R9.2 R9.2@1605,2970
S1_A: TB1.P1_11 U2_S1.3 | length 3607.7
  Top Layer w10: TB1.P1_11 2165.91,2455 2775,2455 2820,2410 3385,2410 3810,2835 3810,3295 3870,3355 3870,3579.56 4015.44,3725 4385,3725 U2_S1.3
S1_B: TB1.P1_26 U2_S1.6 | length 4080.9
  Top Layer w10: TB1.P1_26 1590.91,2130 3314.85,2130 3930,2745.15 3930,3245.29 3990,3305.29 3990,3529.85 4065.15,3605 4205,3605 U2_S1.6
S1_C: TB1.P1_28 U2_S1.7 | length 4103.8
  Top Layer w10: TB1.P1_28 1550.91,2070 3339.71,2070 3930,2660.29 3930,2684.35 3990,2744.35 3990,3220.44 4050,3280.44 4050,3520 4085,3555 4175,3555 U2_S1.7@4245,3485
S1_D: TB1.P1_22 U2_S1.4 | length 4080.9
  Top Layer w10: TB1.P1_22 1730.91,2190 3290,2190 3870,2770 3870,3270.15 3930,3330.15 3930,3554.71 4040.29,3665 4345,3665 U2_S1.4
S10_A: TB1.P1_29 U2_S10.3 | length 5542.8
  Top Layer w10: TB1.P1_29 1435.91,2625 2820,2625 2842.5,2647.5 3280,2647.5 3560,2927.5 3560,3379.56 3605.44,3425 3605.44,3660 3862.72,3917.28 5337.72,3917.28 U2_S10.3
S10_B: TB1.P1_25 U2_S10.6 | length 4978.7
  Top Layer w10: TB1.P1_25 1545.91,2535 2820,2535 2827.5,2527.5 3329.71,2527.5 3680,2877.79 3680,3329.85 3735,3384.85 3735,3619.85 3947.57,3832.43 5122.57,3832.43 U2_S10.6
S10_C: TB1.P1_21 U2_S10.7 | length 4671
  Top Layer w10: TB1.P1_21 1700.91,2490 2820,2490 2842.5,2467.5 3354.56,2467.5 3740,2852.94 3740,3305 3795,3360 3795,3595 3990,3790 5080,3790 U2_S10.7@5230,3640
S10_D: TB1.P1_27 U2_S10.4 | length 5307.7
  Top Layer w10: TB1.P1_27 1490.91,2580 2820,2580 2827.5,2587.5 3304.85,2587.5 3620,2902.65 3620,3354.71 3675,3409.71 3675,3644.71 3905.15,3874.85 5280.15,3874.85 U2_S10.4
SET_ANN: P5.2 R6.1 TB1.P1_31 | length 2560.2
  Top Layer w10: TB1.P1_31 1365.12,2654.21 2694.21,2654.21 v1(2835,2795)
  Top Layer w20: P5.2 2835,3325 R6.1
  Bottom Layer w20: v1(2835,2795) 2835,3145 R6.1
SET_BRI: P6.2 TB1.P1_39 | length 1986.6
  Top Layer w10: TB1.P1_39 1165.12,2854.21 2199.21,2854.21 v1(2200,2855)
  Bottom Layer w20: P6.2@2120,3120 2130,3120 P6.2 2205,3055 v1@2205,2855
SET_H: P1.2 R1.1 TB1.P1_37 | length 1911.3
  Top Layer w10: TB1.P1_37 1215.12,2804.21 2254.21,2804.21 v1(2295,2845)
  Top Layer w25: R1.1 P1.2
  Bottom Layer w25: v1(2295,2845) R1.1
SET_M: P2.2 R2.1 TB1.P1_35 | length 2346.7
  Top Layer w10: TB1.P1_35 1265.12,2754.21 2339.21,2754.21 v1(2365,2780)
  Top Layer w20: P2.2 2455,3345 R2.1
  Bottom Layer w20: v1(2365,2780) 2365,3255 P2.2
SET_S: P3.2 R3.1 TB1.P1_33 | length 2420.6
  Top Layer w10: TB1.P1_33 1315.12,2704.21 2574.21,2704.21 ; 2575,2705 2574.21,2704.21 ; v1(2755,2800) 2659.21,2704.21 2574.21,2704.21
  Top Layer w20: P3.2 2935,2960 R3.1
  Bottom Layer w20: v1(2755,2800) P3.2
VANODE: Q1.1 R12_H1.1 R12_H10.1 R12_M1.1 R12_M10.1 R12_S1.1 R12_S10.1 | length 6690.6
  Top Layer w50: v1(4070,2650) 4145,2575 4145,2200 R12_S1.1 4475,2065 4665,2255 4795,2255 4905,2365 5120,2365 R12_S10.1 5490,2230 5660,2060 6055,2060 ; R12_M1.1 5770,1380 6055,1665 6055,2060 ; R12_H10.1 R12_H1.1 6700,2060 6055,2060
  Bottom Layer w50: Q1.1 3725,2995 v1(4070,2650) ; R12_M10.1 5490,495 5770,775 R12_M1.1
VDD: P1.1 P2.1 P3.1 P5.1 P6.1 TB1.P1_3 TB1.P1_4 | length 14.1
  Top Layer w20: P1.1 P1.1@2440,3060 ; P3.1 P3.1@2760,3065
pads on no net: P9_H1.11 P9_H1.12 P9_H1.14 P9_H10.11 P9_H10.12 P9_H10.14 P9_M1.11 P9_M1.12 P9_M1.14 P9_M10.11 P9_M10.12 P9_M10.14 P9_S1.11 P9_S1.12 P9_S1.14 P9_S10.11 P9_S10.12 P9_S10.14 TB1.P1_6 TB1.P1_7 TB1.P1_8 TB1.P1_9 TB1.P1_10 TB1.P1_12 TB1.P1_13 TB1.P1_14 TB1.P1_15 TB1.P1_16 TB1.P1_17 TB1.P1_18 TB1.P1_19 TB1.P1_20 TB1.P1_24 TB1.P1_34 TB1.P1_42 TB1.P1_43 TB1.P1_44 TB1.P1_45 TB1.P1_46 TB1.P1_47 TB1.P1_48 TB1.P2_1 TB1.P2_2 TB1.P2_5 TB1.P2_6 TB1.P2_7 TB1.P2_8 TB1.P2_9 TB1.P2_10 TB1.P2_12 TB1.P2_15 TB1.P2_16 TB1.P2_17 TB1.P2_18 TB1.P2_19 TB1.P2_20 TB1.P2_21 TB1.P2_22 TB1.P2_23 TB1.P2_24 TB1.P2_28 TB1.P2_29 TB1.P2_32 TB1.P2_35 TB1.P2_37 TB1.P2_38 TB1.P2_39 TB1.P2_40 TB1.P2_41 TB1.P2_42 TB1.P2_43 TB1.P2_44 TB1.P2_45 TB1.P2_46 TB1.P2_47 TB1.P2_48
copper on no net:
  other v3: 7529.49,2684.92 6053.11,2940.83 6919.25,3728.23

## Polygon pours and split planes (outlines as drawn)
GND on Bottom Layer "GND" (solid, remove dead copper, pour order 25): 50,3950 50,50 7950,50 7950,3950
VDD on Bottom Layer "5V" (solid, remove dead copper, pour order 18): 2270,3440 3055,3440 3055,2990 2576.96,2500 2576.96,2245 2446.12,2245 2446.12,2445 2445,2445 2445,3200 2395,3260 2395,3305 2270,3305
5V on Bottom Layer "5V" (solid, remove dead copper, pour order 21): 5475,3710 5475,3500 5095,3500 4970,3375 4460,3375 4355,3270 4050,3270 4050,3125 4325,2850 4325,2110 4650,1785 4780,1785 4780,1635 4650,1635 4650,1615 4250,1215 4250,300 5920,300 6300,680 6300,800 6425,800 6425,665 6550,540 7450,540 7450,50 7445.94,45.94 2440,45 1050,45.94 1050,3205 1300,3205 1380,2890 1380,2240.91 2875,550 3915,550 3915,2365 4100,2550 4100,2695 3800,2995 3800,3490 4020,3710
VDD on Top Layer "5V" (solid, remove dead copper, pour order 16): 2060,3295 2835,3295 2835,2990 2365,2990 2350,2990 2185,3155 2180,3160 2060,3160 2060,3295

## Silkscreen, mask and mechanical layers (free items; w line width, h text height)
Top Overlay:
  lines w10: 525,3890 565,3890 ; 545,3865 545,3915 ; 1675,3920 1715,3920 ; 1700,3895 1700,3945 ; 2010,3235 2075,3235 ; 2045,3205 2045,3270 ; 2500,3060 2540,3060 ; 2500,3215 2540,3215 ; 2520,3035 2520,3085 ; 2520,3190 2520,3240 ; 2650,3060 2690,3060 ; 2650,3220 2690,3220 ; 2670,3035 2670,3085 ; 2670,3195 2670,3245 ; 3216.58,3533.24 3281.58,3533.24 ; 3251.58,3503.24 3251.58,3568.24 ; 7670,3850 5935,3850 5935,2055 7860.63,2055
  lines w30: 2125,3945 2125,3445 3200,3445 3200,2800 3990,2800 3990,45
  text "HIGH" at 2230,3595 h60 r90
  text "VOLTAGE!" at 2325,3515 h60 r90
  text "HIGH" at 4110,1620 h60 r90
  text "VOLTAGE!" at 4205,1540 h60 r90
  text "STM32F4 Nixie Clock" at 5630,410 h60
  text "Rev 01" at 5630,305 h60
  text "Evan Reeves" at 5630,205 h60
Mechanical 1:
  the board outline again, w10

## Text inside footprints (layer, text, board x,y; h text height)
5Vout: Top Overlay "6" at 1930,3520 h50 r90; Top Overlay "5" at 1830,3520 h50 r90; Top Overlay "2" at 1935,3900 h50 r90; Top Overlay "1" at 1840,3905 h50 r90
P9_H1: Top Overlay "13" at 6490,1930 h50 r90; Top Overlay "14" at 6190,1930 h50 r90; Top Overlay "1" at 6385,1210 h50 r90; Top Overlay "2" at 6285,1210 h50 r90
P9_H10: Top Overlay "2" at 7315,905 h50 r90; Top Overlay "1" at 7415,905 h50 r90; Top Overlay "14" at 7315,1705 h50 r90; Top Overlay "13" at 7415,1705 h50 r90
P9_M1: Top Overlay "13" at 5990,1695 h50; Top Overlay "14" at 5990,1795 h50; Top Overlay "1" at 5190,1695 h50; Top Overlay "2" at 5190,1795 h50
P9_M10: Top Overlay "13" at 5385,425 h50; Top Overlay "14" at 5385,525 h50; Top Overlay "1" at 4585,425 h50; Top Overlay "2" at 4585,525 h50
P9_S1: Top Overlay "13" at 4415,2185 h50 r270; Top Overlay "14" at 4515,2185 h50 r270; Top Overlay "1" at 4415,2985 h50 r270; Top Overlay "2" at 4515,2985 h50 r270
P9_S10: Top Overlay "13" at 5395,2350 h50 r270; Top Overlay "14" at 5495,2350 h50 r270; Top Overlay "1" at 5395,3150 h50 r270; Top Overlay "2" at 5495,3150 h50 r270